# Altium PCB BLDC_Motor_Reversal_Rev2.PcbDoc
Units mm, origin at the board's own origin, x right, y up, seen from the top; angles counter-clockwise.
Board outline 100 x 85 mm, 2 copper layers (Top Layer, Bottom Layer), stack 1.671 mm thick; 25 components, 15 nets, 65 pads, 33 vias.
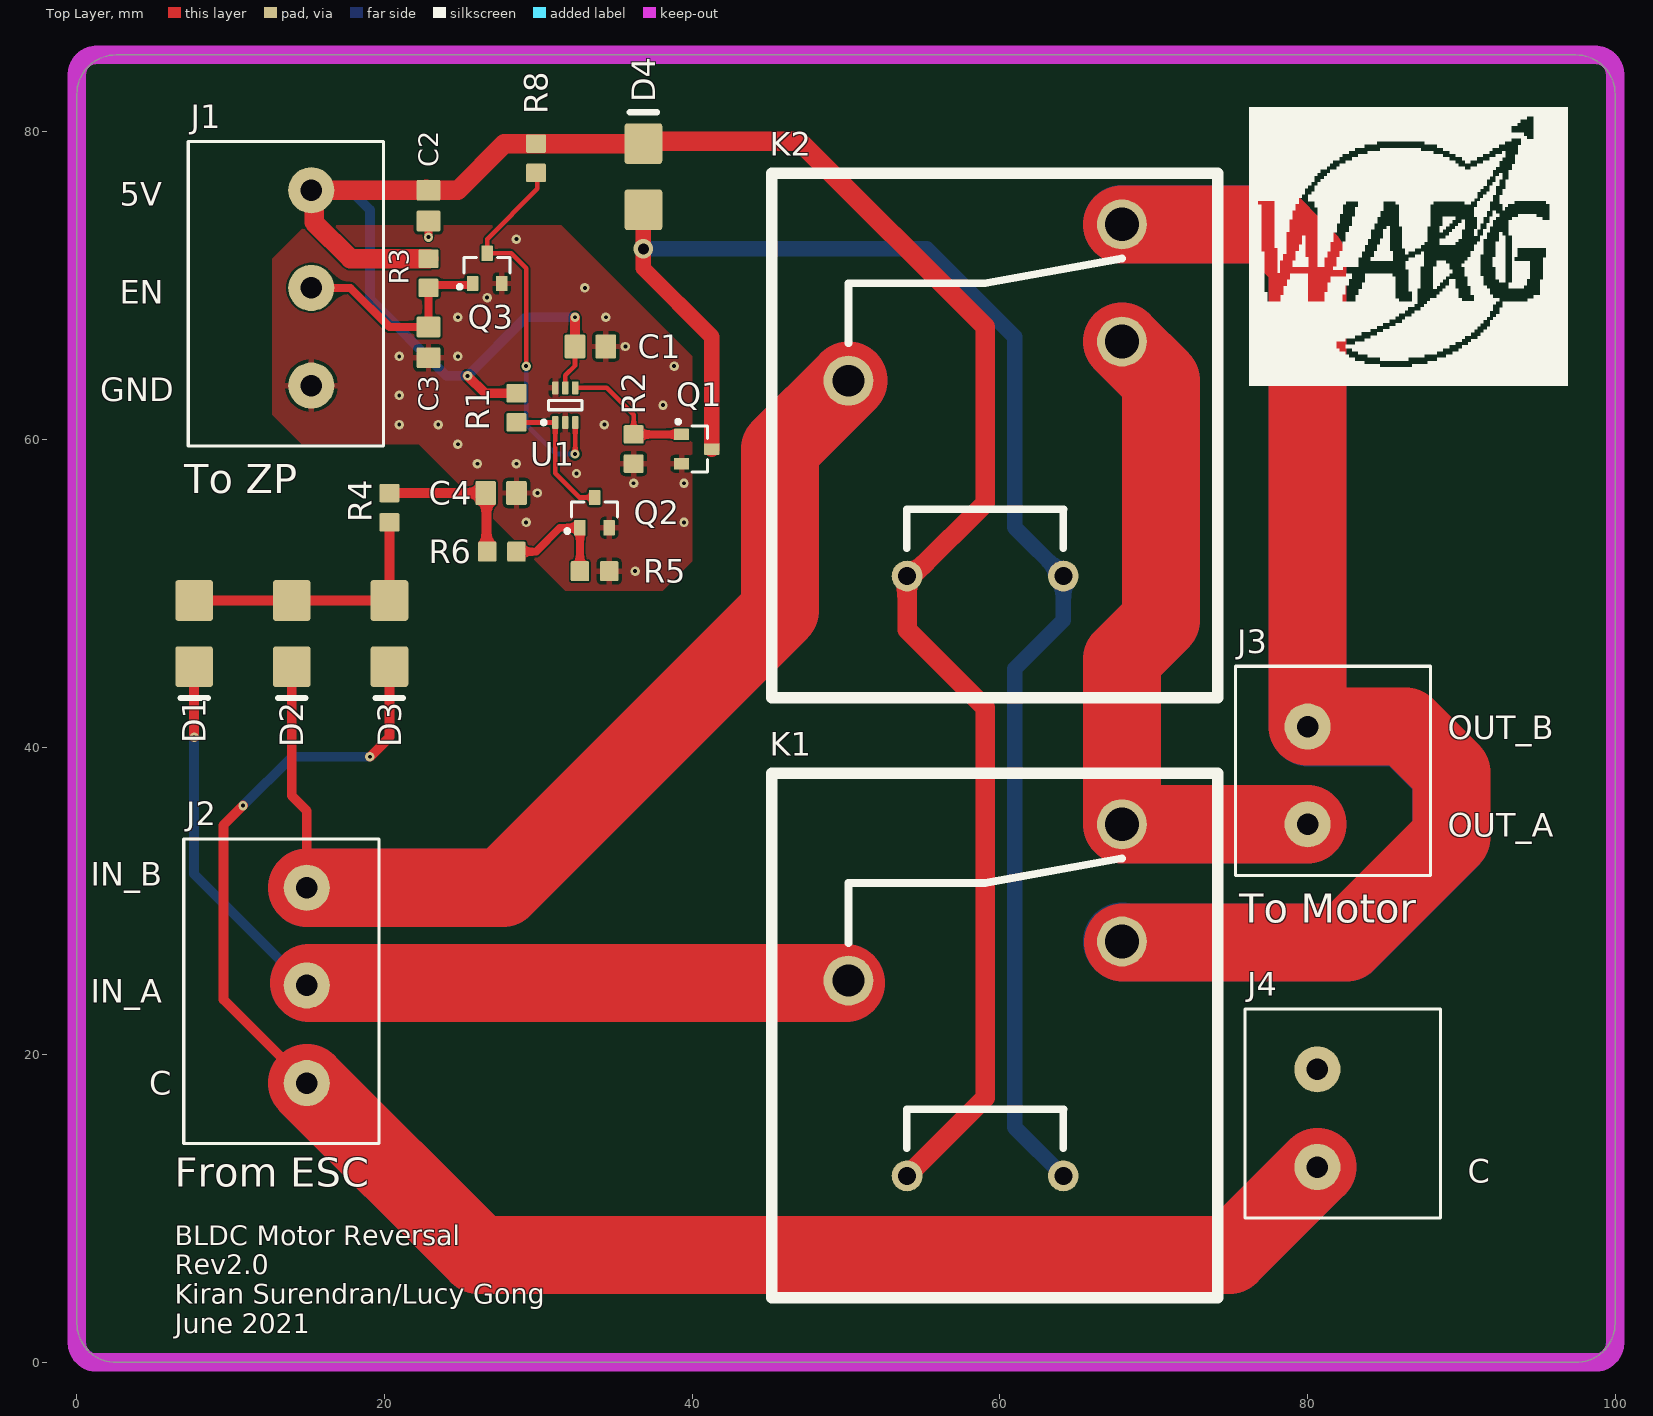
[diagram p0: Top Layer view]
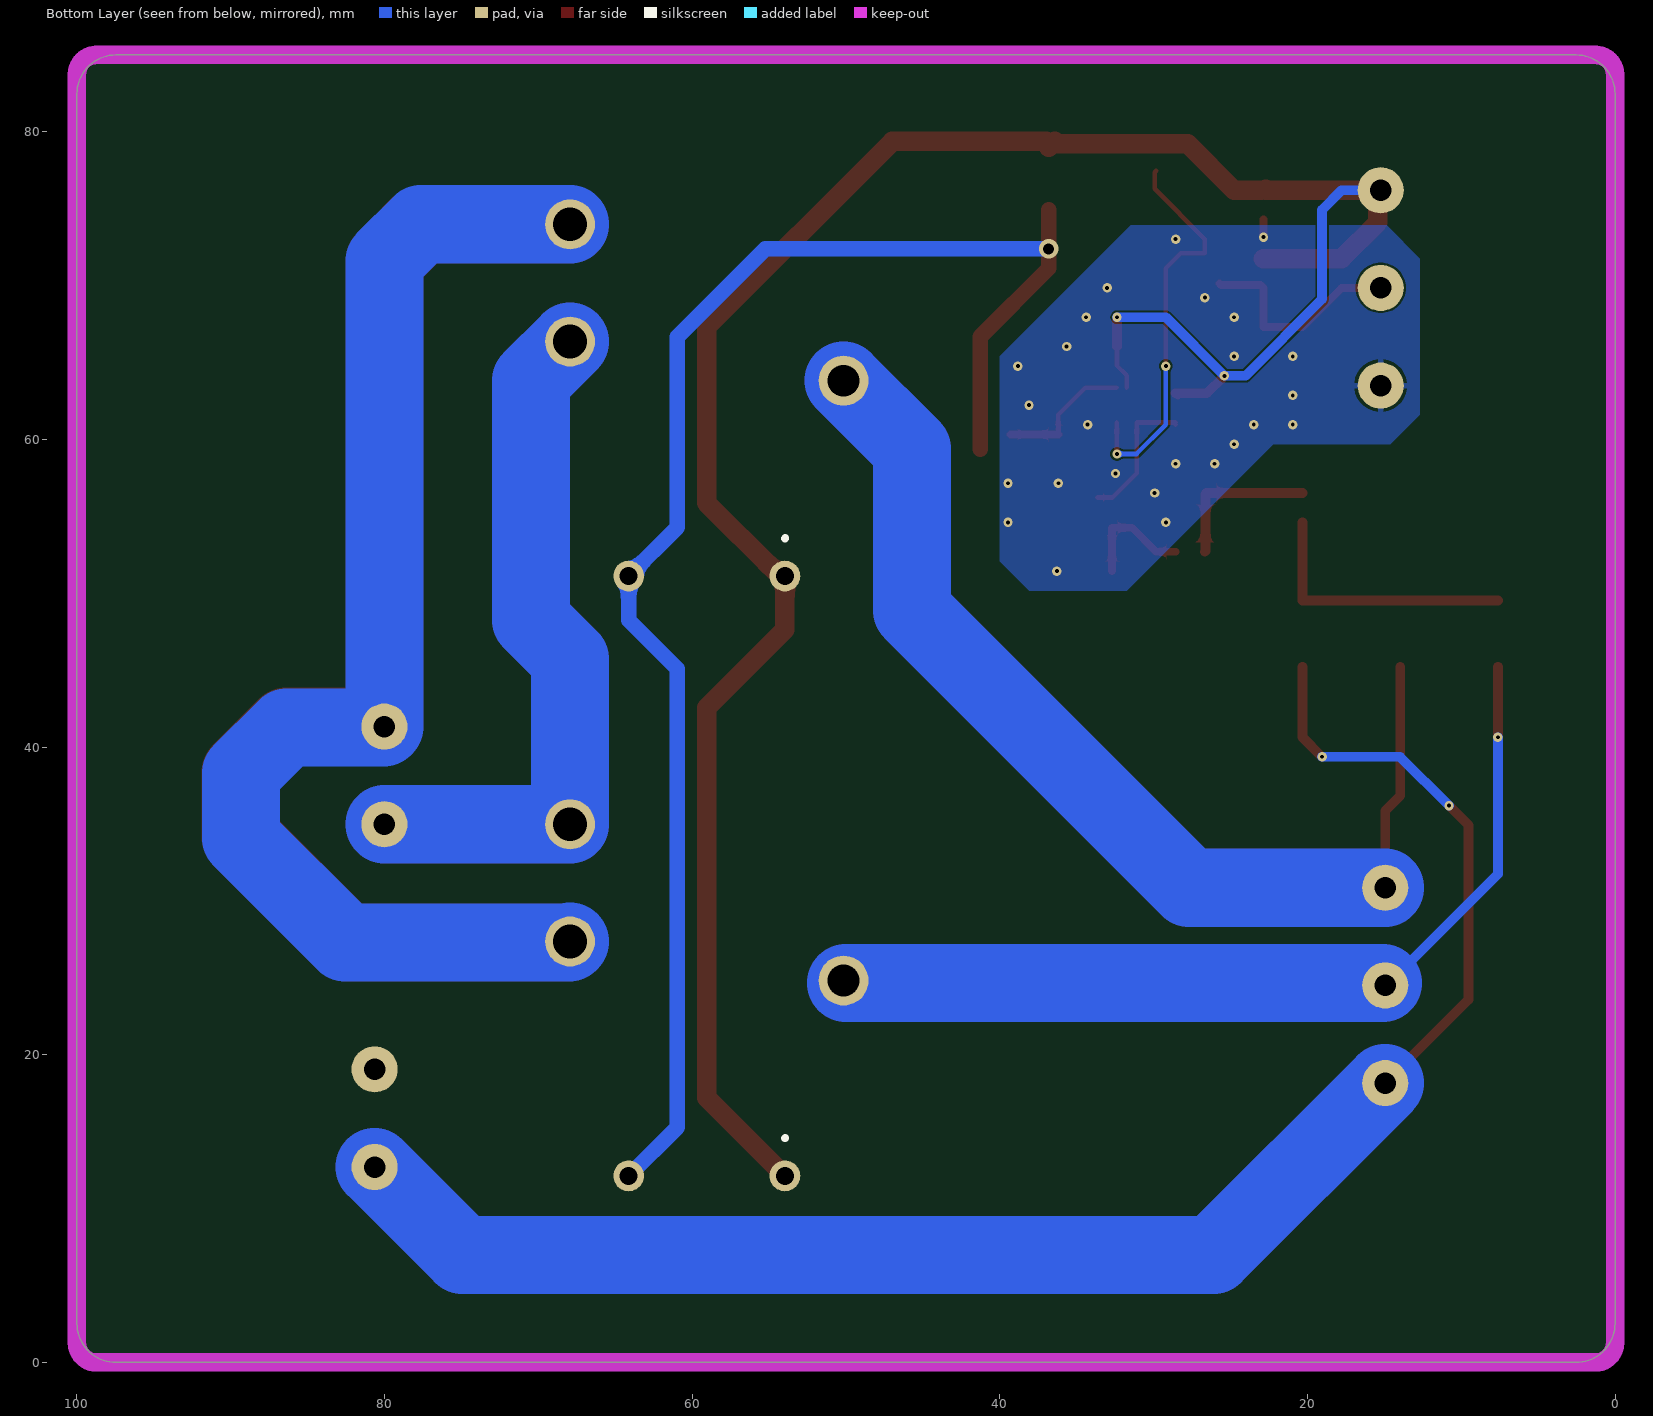
[diagram p1: Bottom Layer view, seen from below]
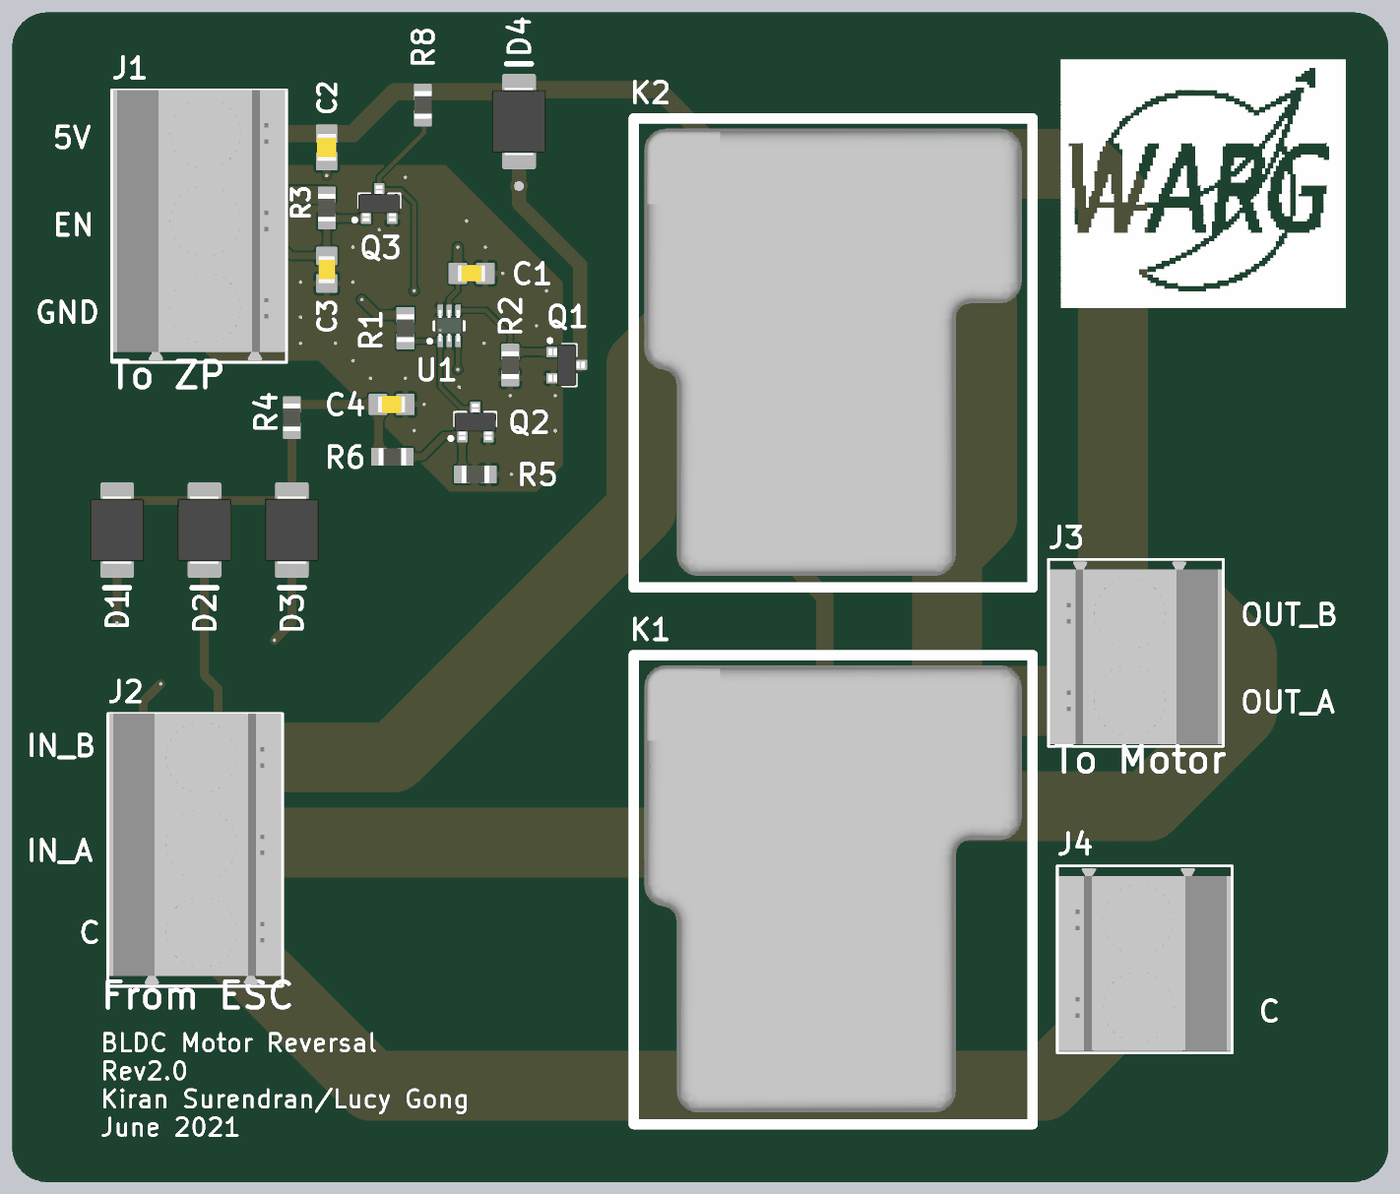
[diagram p2: 3D render of the assembled board from above, using the file's embedded part models]

## Layer stack, top to bottom
Top Solder: solder mask 0.0102, Solder Resist, Dk 3.5
Top Layer: signal copper 0.0356
Dielectric 1: dielectric 1.6, FR-4, Dk 4.8
Bottom Layer: signal copper 0.0356
Bottom Solder: solder mask 0.0102, Solder Resist, Dk 3.5

## Board outline
0,82.46 cw(c2.54,82.46) 2.54,85 97.46,85 cw(c97.46,82.46) 100,82.46 100,2.54 cw(c97.46,2.54) 97.46,0 2.54,0 cw(c2.54,2.54) 0,2.54

## Design rules (kind name [scope] priority, off if disabled: settings)
BoardOutlineClearance [All] p1: gap=0.2 ignorepadtopadclearanceinfootprint=FALSE
Clearance Clearance_1 [All] p1: gap=0.127 ignorepadtopadclearanceinfootprint=FALSE except(0.25: Arc-Hole Track-Hole SMDPad-Hole THPad-Hole Via-Hole Fill-Hole Poly-Hole Region-Hole Text-Hole)
Clearance "Polygon to others" [All] p2: gap=0.254 ignorepadtopadclearanceinfootprint=FALSE
ComponentClearance [All] p1: gap=0.127 collisioncheckmode=3 verticalgap=0.127 showdistances=TRUE
DiffPairsRouting [All] p1: maxlimit=0.254 minlimit=0.127 mostfreqgap=0.127 toplayer_minwidth=0.127 toplayer_maxwidth=25.4 toplayer_prefwidth=0.127 bottomlayer_minwidth=0.127 bottomlayer_maxwidth=25.4 bottomlayer_prefwidth=0.127 maxuncoupledlength=12.7
Height [All] p1: minheight=0 maxheight=1816.048 prefheight=12.7
HoleSize [All] p1: absolutevalues=TRUE maxlimit=6.3 minlimit=0.254 maxpercent=80.000 minpercent=20.000
HoleToHoleClearance [All] p1: gap=0.25 allowstackedmicrovias=FALSE
MinimumAnnularRing [All] p1: minimumring=0.076
MinimumSolderMaskSliver [All] p1: minsoldermaskwidth=0
PlaneClearance [All] p1: clearance=0.127
PlaneConnect PlaneConnectPowerPads [InPadClass('PowerPads')] p1: planeconnectstyle=Direct reliefexpansion=0.508 reliefentries=4 reliefconductorwidth=0.254 reliefairgap=0.254
PlaneConnect [All] p2: pad.planeconnectstyle=Relief pad.reliefexpansion=0.3 pad.reliefentries=4 pad.reliefconductorwidth=0.127 pad.reliefairgap=0.127 via.planeconnectstyle=Direct via.reliefexpansion=0.3 via.reliefentries=4 via.reliefconductorwidth=0.127 via.reliefairgap=0.127
PolygonConnect PolygonConnectPowerPads [All vs (InPadClass('PowerPads'))] p1: connectstyle=Direct reliefconductorwidth=0.254 reliefentries=4 polygonreliefangle="90 Angle" airgapwidth=0.254
PolygonConnect [All] p2: thpad.connectstyle=Relief thpad.reliefconductorwidth=0.381 thpad.reliefentries=4 thpad.polygonreliefangle="90 Angle" thpad.airgapwidth=0.203 smdpad.connectstyle=Relief smdpad.reliefconductorwidth=0.381 smdpad.reliefentries=4 smdpad.polygonreliefangle="90 Angle" smdpad.airgapwidth=0.203 via.connectstyle=Direct via.reliefconductorwidth=0.127 via.reliefentries=4 via.polygonreliefangle="90 Angle" via.airgapwidth=0.127
RoutingVias [All] p1: holewidth=0.254 width=0.61 viastyle="Through Hole" minholewidth=0.254 minwidth=0.61 maxholewidth=0.6 maxwidth=6.6
SilkToSilkClearance [All] p1: silktosilkclearance=0
SilkToSolderMaskClearance [IsPad] p1: minsilkscreentomaskgap=0.127 clearancetoexposedcopper=TRUE
SolderMaskExpansion SolderMaskExpansion_Via [All] p1: expansion=0.102 istentingtop=TRUE
SolderMaskExpansion [All] p2: expansion=0.075 istentingtop=FALSE
Width [All] p1: maxlimit=25.4 minlimit=0.127 preferedwidth=0.127 minimp=50.000000 maximp=50.000000 favimp=50.000000
20 further rules are at their usual default settings.

## Components (designator, comment, footprint, x,y, rotation, side; value= is the part's Value field where it differs from the comment)
C1 "C0805C104K5RACTU" C0805C104K5RACTU 33.385,66.04 r180 top
C2 "C0805C106K4PACTU" C0805C106K4PACTU 22.86,75.2 r90 top
C3 "C0805C104K5RACTU" C0805C104K5RACTU 22.86,66.31 r90 top
C4 "C0805C104K5RACTU" C0805C104K5RACTU 27.575,56.515 r180 top
D1 "S1GB-13-F" S1GB-13-F 7.62,47.38 r270 top
D2 "S1GB-13-F" S1GB-13-F 13.97,47.38 r270 top
D3 "S1GB-13-F" S1GB-13-F 20.32,47.38 r270 top
D4 "S1GB-13-F" S1GB-13-F 36.83,77.08 r90 top
J1 "1714968" 796740-3 15.24,69.85 r90 top
J2 "1714968" 796740-3 14.948,24.506 r90 top
J3 "1714968" 1714955 80.01,38.157 r270 top
J4 "1714968" 1714955 80.645,15.875 r270 top
K1 "T9AS5D12-5" T9AS5D12-5 50.16,27.262 r0 top
K2 "T9AS5D12-5" T9AS5D12-5 50.16,66.262 r0 top
Q1 "SI2312BDS-T1-E3" SI2312BDS-T1-E3 40.291,59.375 r0 top
Q2 "SI2312BDS-T1-E3" SI2312BDS-T1-E3 33.655,55.245 r90 top
Q3 "SI2312BDS-T1-E3" SI2312BDS-T1-E3 26.67,71.12 r90 top
R1 "RC0805JR-0710KL" RC0805JR-0710KL 28.575,62.055 r90 top
R2 "RC0805JR-0710KL" RC0805JR-0710KL 36.195,59.375 r90 top
R3 "RC0805JR-0710KL" RC0805JR-0710KL 22.86,70.8 r90 top
R4 "RC0805JR-0710KL" RC0805JR-0710KL 20.32,55.56 r90 top
R5 "RC0805JR-0747KL" RC0805JR-0747KL 33.655,51.435 r0 top
R6 "RC0805JR-0710KL" RC0805JR-0710KL 27.625,52.705 r0 top
R8 "RC0805JR-0710KL" RC0805JR-0710KL 29.845,78.28 r90 top
U1 "SN74LVC1G373DCKR" DCK0006A_N 31.75,62.23 r90 top

## Footprints (in the part's own frame and the unit in brackets; to place one, negate y for a bottom-side part, rotate by r counter-clockwise, add the part's x,y. Pads: shape width x height; smd on the part's side, far side on the other; paste and mask are expansions set on the pad)
796740-3 [mm]
  round 3 hole 1.4 mask+0.102: 1(-6.35,0) 2(0,0) 3(6.35,0)
  silkscreen extent -10.28,-4.7 9.53,8, body extent -10.12,-4.6 9.53,7.9, height 21.51
1714955 [mm]
  round 3 hole 1.4: 1(-3.175,0) 2(3.175,0)
  silkscreen extent -7.1,-4.7 6.5,8, body extent -6.95,-4.6 6.35,7.9, height 21.51
C0805C104K5RACTU [mm]
  rrect15% 1.35x1.55 smd: 1(-1,0) 2(1,0)
  body extent -1,-0.6 1,0.6, height 0.89
C0805C106K4PACTU [mm]
  rrect15% 1.35x1.55 smd: 1(-1,0) 2(1,0)
  body extent -1,-0.7 1,0.7, height 1.21
DCK0006A_N [mm] "SOT23, 6-Leads, Body 2.15x1.4mm, Pitch 0.65mm, IPC Medium Density"
  rrect25% 0.85x0.4 smd: 1(-1.125,0.65) 2(-1.125,0) 3(-1.125,-0.65) 4(1.125,-0.65) 5(1.125,0) 6(1.125,0.65)
  silkscreen extent -1.25,-1.1 0.3,1.52, body extent -1.14,-1 1.14,1, height 0.94
RC0805JR-0710KL [mm]
  rrect15% 1.2x1.3 smd: 1(-0.95,0) 2(0.95,0)
  body extent -1,-0.62 1,0.62, height 0.61
RC0805JR-0747KL [mm]
  rrect15% 1.2x1.3 smd: 1(-0.95,0) 2(0.95,0)
  body extent -1,-0.62 1,0.62, height 0.61
S1GB-13-F [mm]
  rrect15% 2.65x2.45 smd: 1(2.15,0) 2(-2.15,0)
  silkscreen extent 4.19,-0.89 4.19,0.89, body extent -2.5,-1.97 2.5,1.97, height 2.5
SI2312BDS-T1-E3 [mm]
  rrect15% 1x0.75 smd: 1(-0.984,0.95) 2(-0.984,-0.95) 3(0.984,0)
  silkscreen extent -1.32,-1.5 0.7,1.9, body extent -1.32,-1.52 1.32,1.52, height 1.12
T9AS5D12-5 [mm]
  round 3.25 hole 2.19: 1(17.78,7.72) 2(17.78,0.1)
  round 3.25 hole 2.06: 3(0,-2.44)
  round 2 hole 1.17: 4(3.81,-15.14) 5(13.97,-15.14)
  silkscreen extent -5,-23.06 24,11.03, body extent -4.23,-22.22 23.2,10.3, height 20.05

## Part data
C1 C3 C4: "Cap Ceramic 0.1uF 50V X7R 10% SMD 2.0 x 1.2 mm 125 C Paper T/R", Capacitance=0.1uF, Case/Package=0805, Manufacturer 1=KEMET, Supplier Part Number 1=399-1170-1-ND, Voltage Rating=50V, Manufacturer Part Number 1=C0805C104K5RACTU, Supplier 1=Digi-Key
C2: "CERAMIC CAPACITOR, 10UF, 16V, X5R, 10%, 0805", Capacitance=10uF, Case/Package=0805, Manufacturer 1=KEMET, Supplier Part Number 1=399-8012-1-ND, Voltage Rating=16V, Manufacturer Part Number 1=C0805C106K4PACTU, Supplier 1=Digi-Key
D1 D2 D3 D4: "Flyback Diode for SPDT", Manufacturer 1="Diodes Incorporated", Supplier Part Number 1=S1GB-FDICT-ND, IFSM=8.0A, Manufacturer Part Number 1=S1GB-13-F, Supplier 1=Digi-Key, VRRM=325V
J1 J2: "TERM BLK 3P SIDE ENT 6.35MM PCB", Manufacturer 1="Phoenix Contact", Supplier Part Number 1=277-1270-ND, Manufacturer Part Number 1=1714968, Supplier 1=Digi-Key
J3 J4: library part 1714955, "TERM BLK 2P SIDE ENT 6.35MM PCB", Current Rating=30A, Manufacturer="Phoenix Contact", Supplier Part Number 1=277-1269-ND, Voltage Rating=300V, Manufacturer Part Number=1714968, Supplier 1=Digi-Key
K1 K2: "RELAY GEN PURPOSE SPDT 20A 5V", Coil Current=200mA, Coil Voltage (DC)=5V, Contact Current Rating=20A, Contact Voltage Rating (AC)=277V, Current Rating=30A, Manufacturer 1="TE Connectivity Potter & Brumfield Relays", Supplier Part Number 1=T9AS5D12-5-ND, Manufacturer Part Number 1=T9AS5D12-5, Supplier 1=Digi-Key, Voltage Rating (DC)=5V
Q1 Q2 Q3: "MOSFET", Manufacturer 1="Vishay Siliconix", Supplier Part Number 1=SI2312BDS-T1-E3CT-ND, Manufacturer Part Number 1=SI2312BDS-T1-E3, Supplier 1=Digi-Key
R1 R2 R3 R4 R6 R8: "Res Thick Film 0805 10K Ohm 5% 1/8W ±100ppm/°C Molded SMD Paper T/R", Manufacturer 1=Yageo, Package=0805, Resistance=10kΩ, Supplier Part Number 1=311-10KARCT-ND, Tolerance=5%, Manufacturer Part Number 1=RC0805JR-0710KL, Supplier 1=Digi-Key
R5: library part RC0805JR-074K7L, "4.7k ±5% 0.125W, 1/8W Chip Resistor 0805 (2012 Metric) Moisture Resistant Thick Film", Manufacturer 1=Yageo, Package=0805, Resistance=4.7kΩ, Supplier Part Number 1=311-4.7KARTR-ND, Manufacturer Part Number 1=RC0805JR-074K7L, Supplier 1=Digi-Key
U1: "IC LTCH D-TYP SGL 3-OUT SC70-6", Case/Package=SC, High Level Output Current=-32mA, Low Level Output Current=32mA, Manufacturer="Texas Instruments", Max Operating Temperature=125°C, Max Supply Voltage=5.5V, Min Operating Temperature=-40°C, Min Supply Voltage=1.65V, Operating Supply Voltage=3.3V, Package Quantity=3000, Quiescent Current=10uA, Supplier Part Number 1=296-18775-1-ND, Category="Logic Gates", ComponentLink1Description=https://datasheet.ciiva.com/14288/sn74lvc1g373-14288210.pdf?src-supplier=Avnet, ComponentLink1URL=https://datasheet.ciiva.com/14288/sn74lvc1g373-14288210.pdf?src-supplier=Avnet, ComponentLink2Description=https://datasheet.ciiva.com/15088/getdatasheetpartid-416701-15088509.pdf?src-supplier=Verical, ComponentLink2URL=https://datasheet.ciiva.com/15088/getdatasheetpartid-416701-15088509.pdf?src-supplier=Verical, ComponentLink3Description=https://datasheet.ciiva.com/23782/1634225-23782997.pdf?src-supplier=Newark, ComponentLink3URL=https://datasheet.ciiva.com/23782/1634225-23782997.pdf?src-supplier=Newark, ComponentLink4Description=https://datasheet.ciiva.com/1881/sn74lvc1g373-1881421.pdf?src-supplier=Digi-Key, ComponentLink4URL=https://datasheet.ciiva.com/1881/sn74lvc1g373-1881421.pdf?src-supplier=Digi-Key, ComponentLink5Description=https://datasheet.ciiva.com/1881/sn74lvc1g373-1881422.pdf?src-supplier=Digi-Key, ComponentLink5URL=https://datasheet.ciiva.com/1881/sn74lvc1g373-1881422.pdf?src-supplier=Digi-Key, ComponentLink6Description=https://datasheet.ciiva.com/1881/sn74lvc1g373-1881423.pdf?src-supplier=Digi-Key, ComponentLink6URL=https://datasheet.ciiva.com/1881/sn74lvc1g373-1881423.pdf?src-supplier=Digi-Key, ComponentLink7Description=https://datasheet.ciiva.com/14288/sn74lvc1g373-14288214.pdf?src-supplier=Avnet, ComponentLink7URL=https://datasheet.ciiva.com/14288/sn74lvc1g373-14288214.pdf?src-supplier=Avnet, ComponentLink8Description=https://datasheet.ciiva.com/1508/1836498-1508503.pdf?src-supplier=Element14, ComponentLink8URL=https://datasheet.ciiva.com/1508/1836498-1508503.pdf?src-supplier=Element14, ComponentLink9Description=https://datasheet.ciiva.com/1508/1836498-1508504.pdf?src-supplier=Element14, ComponentLink9URL=https://datasheet.ciiva.com/1508/1836498-1508504.pdf?src-supplier=Element14, Contact Plating=Gold, Height=1mm, Independent Circuits=1, Lead Free="Lead Free", Length=2.15mm, Logic Function=D-Type,Latch, Manufacturer Part Number=SN74LVC1G373DCKR, Mount="Surface Mount", Number of Bits=1, Number of Channels=1, Number of Circuits=1, Number of Elements=1, Number of Gates=1, Number of Input Lines=1, Number of Output Lines=1, Number of Pins=6, Output Current=32mA, Output Type=3-STATE, Packaging="Tape and Reel", Polarity=Non-Inverting, Pricing 1="1=0.40000, 10=0.32400, 25=0.29640, 100=0.22050, 250=0.19980, 500=0.16536, 1000=0.12402 (USD)", Propagation Delay=4ns, Radiation Hardening=No, REACH SVHC="No SVHC", RoHS=Yes, Series=74LVC, Stock 1=1019, Supplier 1=Digi-Key, Technology=CMOS, Termination=SMD/SMT, Turn-On Delay Time=1ns, Weight=8.8E-05oz, Width=1.4mm

## Via types
v1: diameter 0.61, hole 0.254, Top Layer to Bottom Layer, tented both sides, 32 vias
v2: diameter 1.27, hole 0.711, Top Layer to Bottom Layer, tented both sides, 1 vias

## Nets (pads, with @x,y where several pads share a name; then routed paths per layer and width w, separated by ;. In a path a pad name is that pad's centre, name@x,y a point inside that pad or via, vN(x,y) a via of type N, cw(c..) or ccw(c..) an arc to the next point about the centre after c; other vN are vias at no path point)
5V: C1.2 C2.2 D4.1 J1.3 K1.4 K2.4 R1.2 R3.2 R8.2 U1.5 | length 158.1
  Top Layer w0.305: U1.5 31.75,64.173 32.385,64.808 C1.2
  Top Layer w0.508: R1.2@28.435,62.865 R1.2
  Top Layer w0.635: v1(25.4,64.135) 26.53,63.005 R1.2 ; C1.2 v1(32.385,67.945)
  Top Layer w1.27: C2.2@22.72,76.255 22.665,76.2 J1.3 15.425,76.015 15.425,74.11 17.785,71.75 R3.2 ; C2.2@23,76.2 24.765,76.2 27.795,79.23 D4.1@36.44,79.23 ; D4.1@36.44,79.375 D4.1@36.83,78.985 ; D4.1 36.975,79.375 46.99,79.375 59.055,67.31 59.055,55.88 54.662,51.487 54.533,51.487 54.168,51.122 K2.4 53.97,47.63 59.055,42.545 59.055,17.207 K1.4
  Bottom Layer w0.635: J1.3 17.78,76.2 19.05,74.93 19.05,69.12 24.035,64.135 v1(25.4,64.135) 29.21,67.945 v1(32.385,67.945)
DIV_OUT: Q2.1 R5.1 R6.2 | length 7.6
  Top Layer w0.508: R6.2 29.845,52.705 31.401,54.261 Q2.1 R5.1
ENABLE_REVERSE: Q3.3 R8.1 U1.3 | length 25.9
  Top Layer w0.305: v1(29.21,64.77) 29.21,71.12 28.226,72.104 Q3.3 26.67,73.025 29.936,76.291 29.936,77.379 R8.1@29.845,77.47 ; v1(32.385,59.055) 32.393,59.063 32.393,61.098 U1.3
  Bottom Layer w0.305: v1(29.21,64.77) 29.21,60.96 31.115,59.055 v1(32.385,59.055)
FET_ENABLE: Q1.1 R2.2 U1.4 | length 8.9
  Top Layer w0.305: U1.4 34.435,63.355 36.195,61.595 R2.2
  Top Layer w0.508: R2.2 Q1.1
GND: C1.1 C2.1 C3.1 C4.1 J1.1 Q1.2 Q2.2 Q3.2 R2.1 R5.2 U1.2 U1.6 | length 1.1
  Top Layer w0.508: v1(22.86,73.152) C2.1@22.86,74.295
  other v1: 36.29,51.435 29.21,54.61 39.465,54.61 29.94,56.515 36.195,57.15 39.465,57.15 32.48,57.785 26.035,58.42 28.575,58.42 24.765,59.69 20.955,60.96 23.495,60.96 34.29,60.96 38.1,62.23 20.955,62.865 38.83,64.77 20.955,65.405 24.765,65.405 35.655,66.04 24.765,67.945 34.385,67.945 26.67,69.215 33.02,69.85 28.575,73.025
IN_PHASE_A: D1.1 J2.2 K1.3 | length 94.5
  Top Layer w0.635: v1(7.62,40.64) D1.1 ; J2.2 J2.2@15.106,24.664 ; K1.3@50.002,24.664 K1.3
  Top Layer w5.08: J2.2@15.106,24.664 K1.3@50.002,24.664
  Bottom Layer w0.635: v1(7.62,40.64) 7.62,31.75 14.864,24.506 J2.2 J2.2@15.106,24.664 ; K1.3@50.002,24.664 K1.3
  Bottom Layer w5.08: J2.2@15.106,24.664 K1.3@50.002,24.664
IN_PHASE_B: D2.1 J2.3 K2.3 | length 124.8
  Top Layer w0.635: D2.1 13.97,36.83 14.948,35.852 J2.3
  Top Layer w5.08: J2.3 27.681,30.856 45.72,48.895 45.72,59.382 K2.3
  Bottom Layer w5.08: J2.3 27.681,30.856 45.72,48.895 45.72,59.382 K2.3
NetC3_2: C3.2 J1.2 Q3.1 R3.1 | length 14.2
  Top Layer w0.508: J1.2 17.78,69.85 20.32,67.31 C3.2 R3.1 23.047,70.037 25.622,70.037 Q3.1
NetC4_2: C4.2 R4.2 R6.1 | length 10
  Top Layer w0.635: R4.2 20.325,56.515 C4.2 ; C4.2@26.625,56.465 26.625,52.755 R6.1
NetD1_2: D1.2 D2.2 D3.2 R4.1 | length 17.8
  Top Layer w0.635: D1.2 D2.2 D3.2 R4.1
OUT_PHASE_A: J3.2 K1.1 K2.2 | length 91.1
  Top Layer w5.08: K2.2 70.485,63.817 70.485,48.26 67.94,45.715 K1.1 J3.2
  Bottom Layer w5.08: K2.2 70.485,63.817 70.485,48.26 67.94,45.715 K1.1 J3.2
OUT_PHASE_B: J3.1 K1.2 K2.1 | length 164.8
  Top Layer w4.064: K1.2 K1.2@67.997,27.305
  Top Layer w5.08: K2.1 77.637,73.982 79.117,72.502 79.998,71.621 79.998,41.344 J3.1 86.384,41.332 89.36,38.356 89.36,34.148 82.517,27.305 K1.2@67.997,27.305
  Bottom Layer w5.08: K1.2 67.997,27.305 82.55,27.305 89.336,34.091 89.336,38.299 86.36,41.275 80.067,41.275 J3.1 80.01,71.609 77.629,73.99 K2.1@67.94,73.99
PHASE_C: D3.1 J2.1 J4.2 | length 182.2
  Top Layer w0.635: v1(10.795,36.195) 9.525,34.925 9.525,23.579 J2.1 ; v1(19.05,39.37) 20.32,40.64 D3.1
  Top Layer w5.08: J2.1 26.119,6.985 74.93,6.985 J4.2
  Bottom Layer w0.635: v1(10.795,36.195) 13.97,39.37 v1(19.05,39.37)
  Bottom Layer w5.08: J2.1 26.119,6.985 74.93,6.985 J4.2
PHASE_CONTROL_FET: D4.2 K1.5 K2.5 Q1.3 | length 102.4
  Top Layer w1.016: D4.2 v2(36.83,72.39) 36.83,71.12 41.275,66.675 Q1.3
  Bottom Layer w1.016: v2(36.83,72.39) 55.245,72.39 60.96,66.675 60.96,54.292 K2.5 64.13,48.255 60.96,45.085 60.96,15.292 K1.5
VOLT_DETECT_N: Q2.3 R1.1 U1.1 | length 9
  Top Layer w0.305: R1.1@28.575,60.965 R1.1@28.58,60.96 ; R1.1@28.58,61.105 U1.1 31.1,60.96 31.1,57.8 32.671,56.229 Q2.3
pads on no net: J4.1

## Polygon pours and split planes (outlines as drawn)
GND on Bottom Layer "GND_L02_P005" (solid, pour order 5): 12.7,61.595 14.605,59.69 22.225,59.69 31.75,50.165 38.1,50.165 40.005,52.07 40.005,65.405 31.496,73.914 14.859,73.914 12.7,71.755
GND on Top Layer "GND_L01_P004" (solid, pour order 4): 12.7,61.595 14.605,59.69 22.225,59.69 31.75,50.165 38.1,50.165 40.005,52.07 40.005,65.405 31.496,73.914 14.859,73.914 12.7,71.755

## Keep-outs
Keep-Out Layer:
  lines w1.2: 0,83.73 cw(c1.27,83.73) 1.27,85 ; 0,83.73 cw(c1.27,83.73) 1.27,85 ; 0,83.73 0,55 0,1.27 ccw(c1.27,1.27) 1.27,0 98.73,0 ccw(c98.73,1.27) 100,1.27 100,83.73 ccw(c98.73,83.73) 98.73,85 1.27,85

## Silkscreen, mask and mechanical layers (free items; w line width, h text height)
Top Overlay:
  drawing of 11 lines, arcs and shapes, not listed
  text "5V" at 2.794,75.184 h1.52
  text "EN" at 2.794,68.834 h1.52
  text "GND" at 1.524,62.484 h1.52
  text "To ZP" at 6.985,56.515 h1.91
  text "OUT_B" at 89.116,40.508 h1.52
  text "OUT_A" at 89.116,34.158 h1.52
  text "IN_B" at 0.889,30.988 h1.52
  text "To Motor" at 75.565,28.575 h1.91
  text "IN_A" at 0.889,23.368 h1.52
  text "C" at 4.699,17.399 h1.52
  text "C" at 90.424,11.684 h1.52
  text "From ESC" at 6.35,11.43 h1.91
  text "BLDC Motor Reversal / Rev2.0 / Kiran Surendran/Lucy Gong / June 2021" at 6.35,1.905 h1.27